# Altium PCB OpenMoteSTM.PcbDoc
Units mm, origin at the board's own origin, x right, y up, seen from the top; angles counter-clockwise.
Board outline 24.38 x 33.53 mm, 4 copper layers (TopLayer, MidLayer1, MidLayer30, BottomLayer); 53 components, 80 nets, 281 pads, 122 vias.
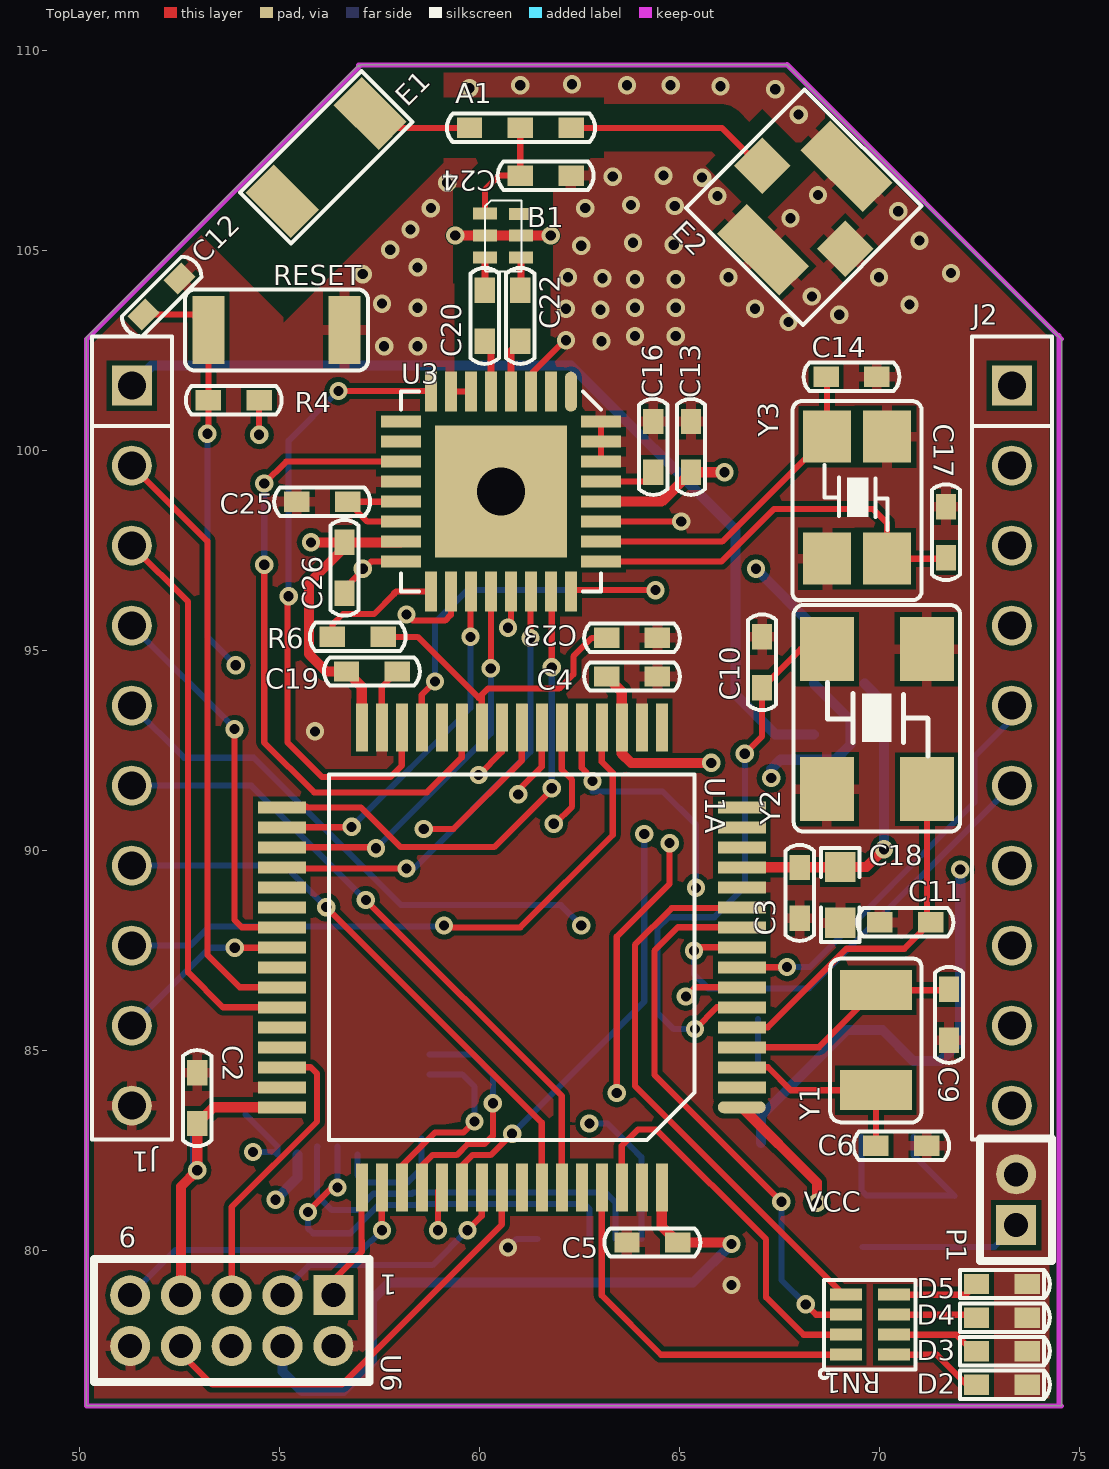
[diagram p0: TopLayer view]
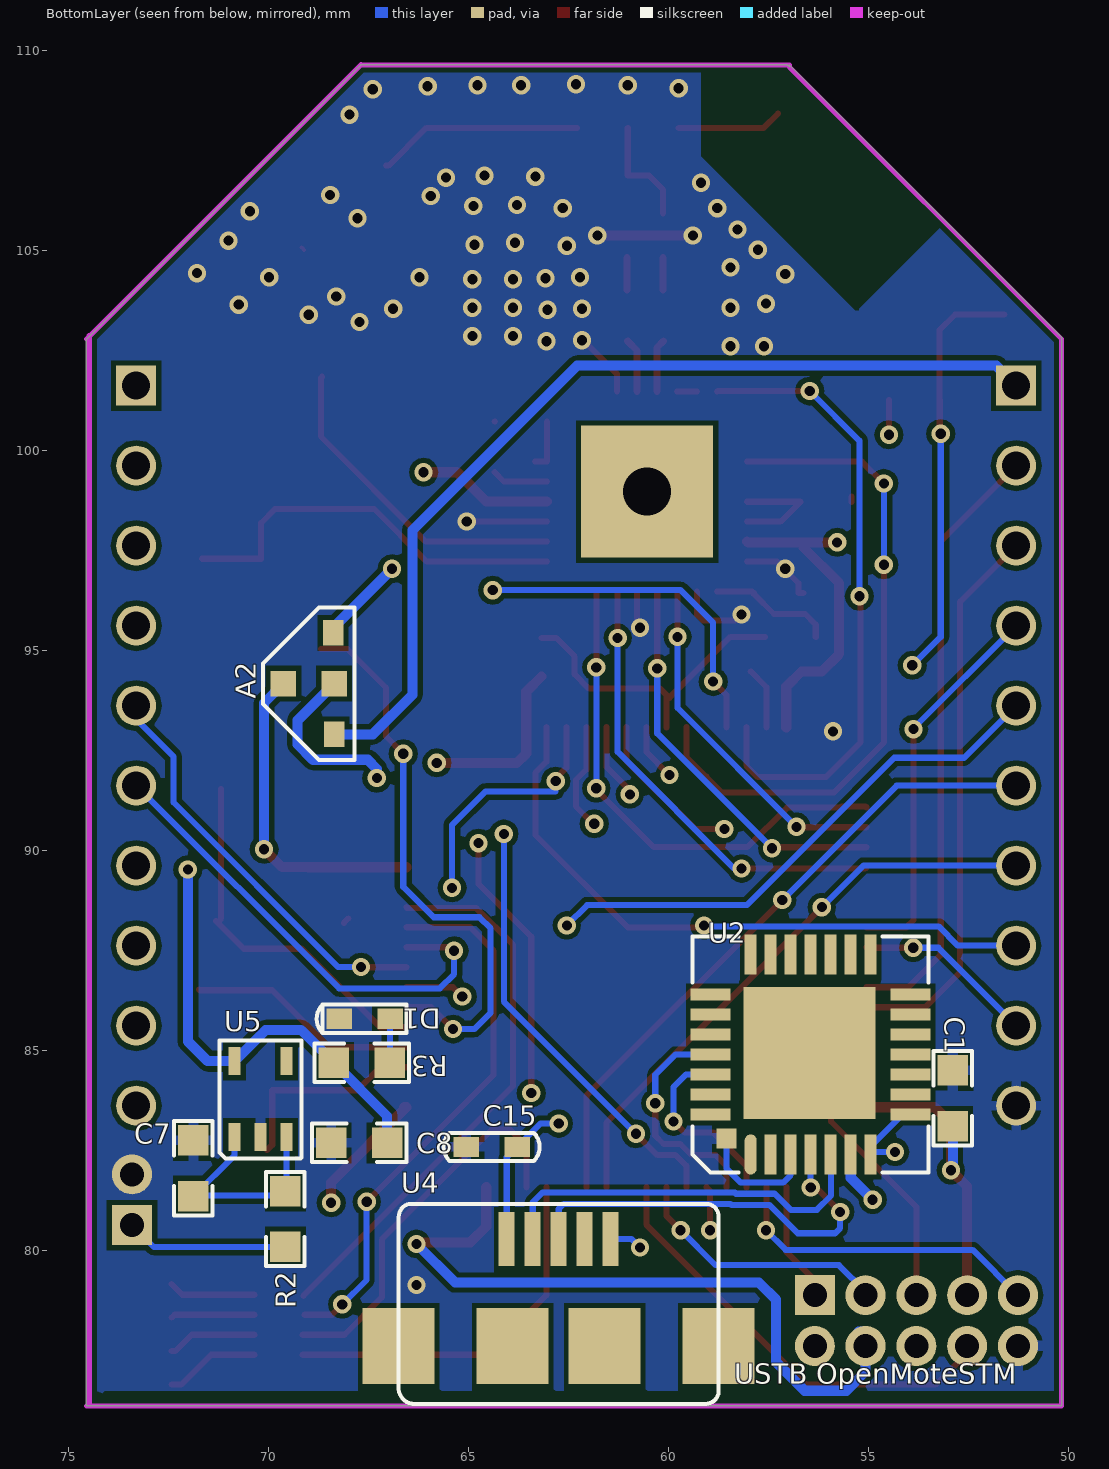
[diagram p1: BottomLayer view, seen from below]
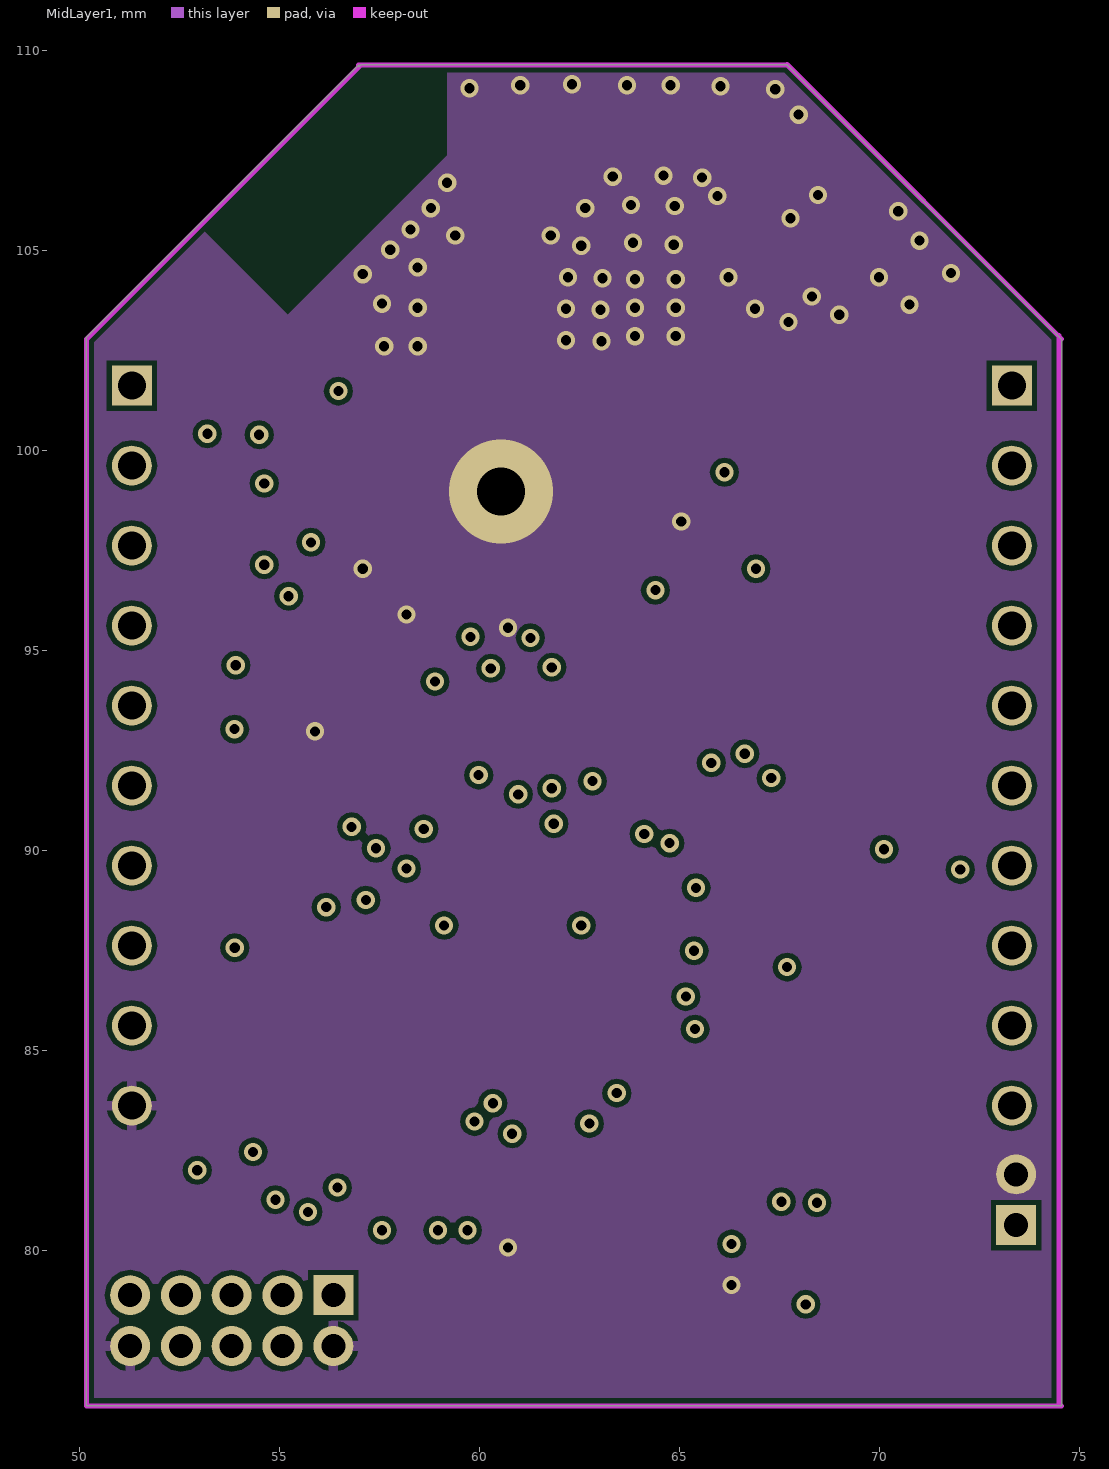
[diagram p2: MidLayer1]
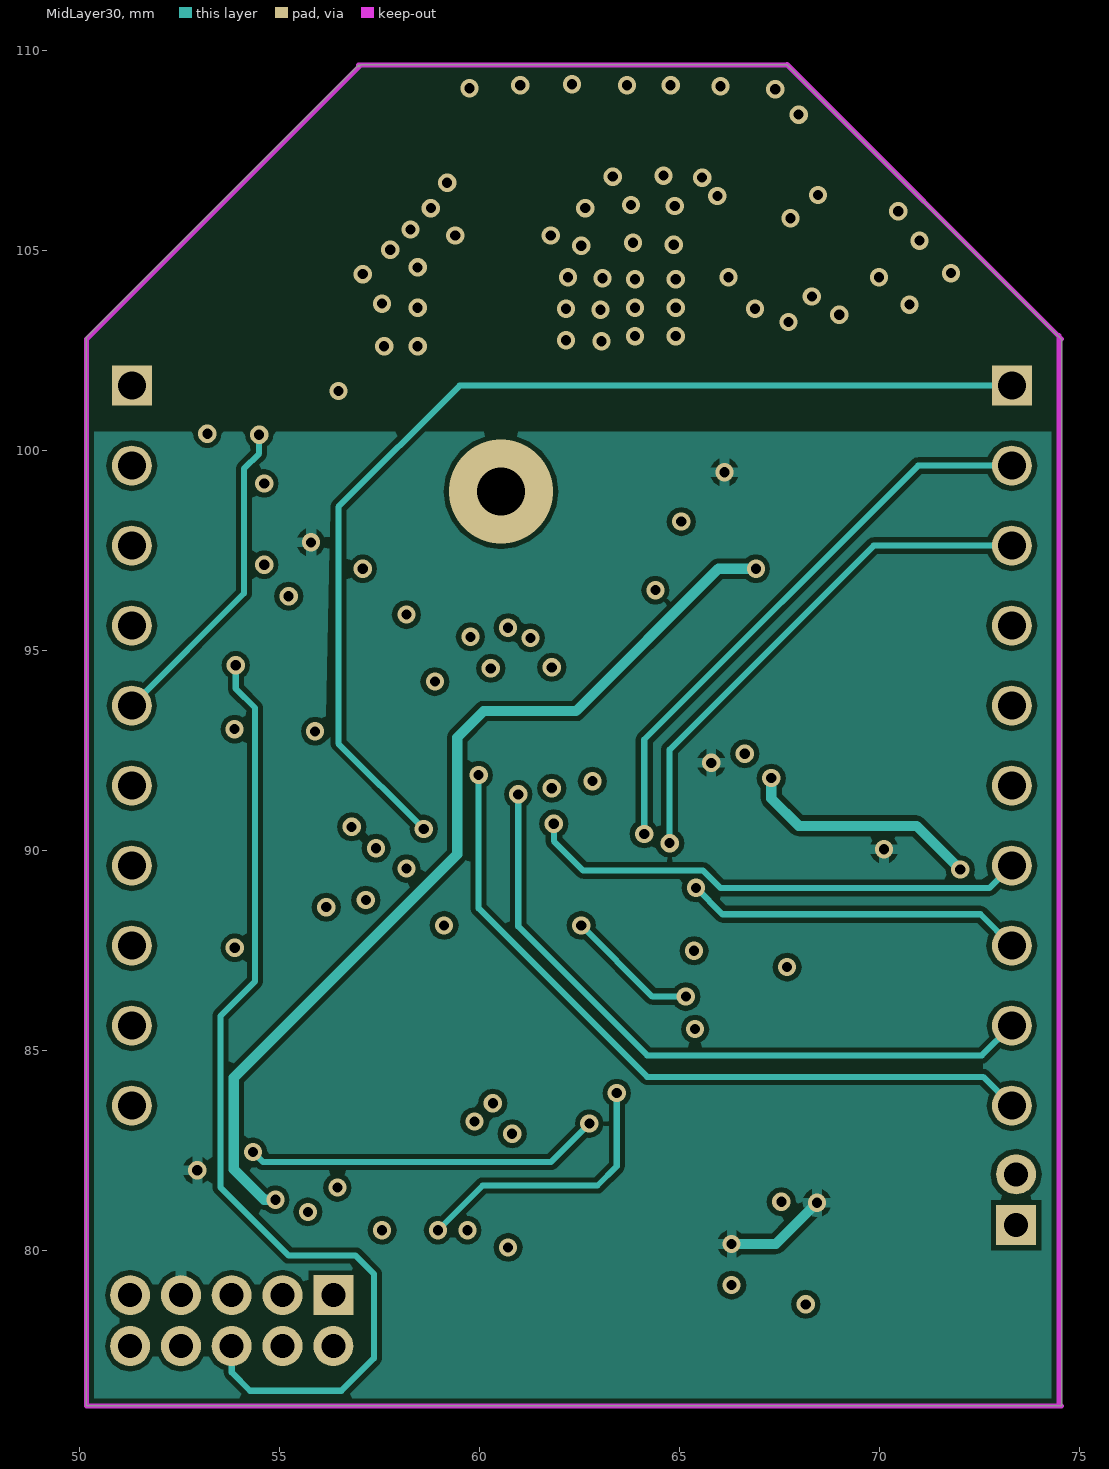
[diagram p3: MidLayer30]

## Layer stack, top to bottom
TopLayer: signal copper 0.0356
Dielectric: core 0.32, FR-4, Dk 4.8
MidLayer1: signal copper 0.0356
Dielectric: dielectric 0.32, FR-4, Dk 4.8
MidLayer30: signal copper 0.0356
Dielectric: dielectric 0.32, FR-4, Dk 4.8
BottomLayer: signal copper 0.0356

## Board outline
56.972,109.601 57.023,109.652 67.676,109.652 67.687,109.652 74.545,102.794 74.545,76.124 50.165,76.124 50.165,102.794 50.165,102.845 56.972,109.652

## Design rules (kind name [scope] priority, off if disabled: settings)
Clearance Clearance_Pad [HasPad('B1-1') OR HasPad('B1-6') OR HasPad('B1-3') OR HasPad('B1-4') OR HasPad('E2-1') OR HasPad('E1-1') OR HasPad('U3-5') OR HasPad('U3-4') vs HasPad('B1-5') OR HasPad('B1-2') OR HasPad('U3-3')OR HasPad('U3-6')OR HasPad('E2-2')OR HasPad('E2-3')OR HasPad('E2-4') OR HasPad('U3-33')] p1: gap=0.127
Clearance "Clearance RF" [InComponent('B1')OR InComponent('C24')OR InComponent('E1') vs InNet('GND')] p2 off: gap=0.508 // Clearance RF
Clearance "Clearance Blaun" [InNet('GND') AND ( Not (HasPad('B1-2') Or  HasPad('B1-5'))) vs InNet('UFL_ANT')OR InNet('CHIP_ANT')OR InNet('NetB1_3')OR InNet('NetB1_4') OR InNet('NetA1_2')OR InNet('NetA1_6')OR InNet('RFP')OR InNet('RFN')OR InNet('NetA1_2') OR InNet('NetB1_6')] p3: gap=0.508
Clearance Clearance_1 [All] p4: gap=0.127
FabricationTestPointUsage TestPointUsage [All] p1: valid=0 allowmultiple=FALSE
FabricationTestpoint Testpoint [All] p1: side=3 testpointundercomponent=TRUE minsize=1.016 maxsize=2.54 preferedsize=1.524 minholesize=0.508 maxholesize=1.016 preferedholesize=0.813 testpointgrid=0.025 allowsidetop=TRUE allowsidebottom=TRUE usegrid=TRUE gridtolerance=0
PasteMaskExpansion PasteMaskExpansion_1 [All] p1: expansion=0
PasteMaskExpansion [All] p2: expansion=0
PlaneClearance PlaneClearance_1 [All] p1 off: clearance=0.508
PlaneClearance [All] p2 off: clearance=0.254
PlaneConnect [All] p1 off: planeconnectstyle=Relief reliefexpansion=0.508 reliefentries=4 reliefconductorwidth=0.254 reliefairgap=0.254
PolygonConnect PolygonConnect_2 [HasFootprint('0402') OR HasFootprint('0603') OR   InComponent('RESET')OR InComponent('J1')OR InComponent('U6')OR InComponent('J4')OR InComponent('U2')OR InComponent('U4')OR InComponent('U5')OR InComponent('BT1')OR InComponent('Y2')OR InComponent('Y1')OR InComponent('Y3')OR HasFootprint('0402') OR HasFootprint('0603')OR InComponent('U3')OR InComponent('U1A')OR InComponent('E2')] p1: connectstyle=Relief reliefconductorwidth=0.254 reliefentries=4 polygonreliefangle="90 Angle"
PolygonConnect PolygonConnect_1 [InNet('+3V')] p2 off: connectstyle=Relief reliefconductorwidth=0.254 reliefentries=4 polygonreliefangle="90 Angle"
PolygonConnect [All vs InNet('GND')] p3: connectstyle=Direct reliefconductorwidth=0.254 reliefentries=4 polygonreliefangle="90 Angle"
RoomDefinition OpenMoteSTM_TOP [InComponentClass('OpenMoteSTM_TOP')] p1: confinementstyle=ConfineIn formatcopy=TRUE lockcomponents=FALSE outline 50.165,76.124 74.447,76.124 74.447,109.632 74.378,109.703 50.165,109.703
RoutingVias [All] p1: holewidth=0.203 width=0.508 viastyle="Through Hole" minholewidth=0.203 minwidth=0.508 maxholewidth=0.203 maxwidth=0.508
ShortCircuit ShortCircuit_1 [All] p1: allowed=FALSE
SilkscreenOverComponentPads [All] p1: minsilkscreentomaskgap=0.254
SolderMaskExpansion SolderMaskExpansion_1 [All] p1: expansion=0.102
SolderMaskExpansion [All] p2: expansion=0.051
UnRoutedNet UnRoutedNet_1 [All] p1 off:
UnRoutedNet [All] p2:
Width [All] p1: maxlimit=0.338 minlimit=2539.975 preferedwidth=0.254 toplayer_minwidth=0 midlayer1_minwidth=0 midlayer30_minwidth=0 bottomlayer_minwidth=0 minimp=50.000000 maximp=50.000000 favimp=50.000000
20 further rules are at their usual default settings.

## Components (designator, comment, footprint, x,y, rotation, side; value= is the part's Value field where it differs from the comment)
A1 "ANT_SWITCH" AN_SW 61.011,108.077 r0 top
A2 "POWER-SELECT" POWer-select 68.351,94.183 r90 bottom
B1 "HHM1711D1" HHM1711D1 60.579,105.385 r270 top
C1 "Cap Pol1" 0603 52.883,83.82 r90 bottom
C2 "Cap" 0402 52.934,83.82 r270 top
C3 "Cap" 0402 67.996,88.951 r90 top
C4 "Cap" 0402 63.805,94.361 r180 top
C5 "Cap" 0402 64.313,80.213 r0 top
C6 "Cap" 0402 70.536,82.626 r180 top
C7 "Cap Pol1" 0603 71.869,82.067 r90 bottom
C8 "Cap Pol1" 0603 67.729,82.702 r0 bottom
C9 "Cap" 0402 71.73,85.903 r90 top
C10 "Cap" 0402 67.056,94.717 r270 top
C11 "Cap" 0402 70.637,88.214 r0 top
C12 "Cap" 0402 52.045,103.861 r45 top
C13 "Cap Pol1" 0402 65.278,100.101 r270 top
C14 "Cap" 0402 69.291,101.854 r0 top
C15 "Cap Pol1" 0402 64.414,82.601 r0 bottom
C16 "Cap Pol1" 0402 64.338,100.101 r270 top
C17 "Cap" 0402 71.653,97.968 r90 top
C18 "Cap Pol1" 0603 69.012,88.9 r270 top
C19 "Cap" 0402 57.302,94.488 r180 top
C20 "Cap" 0402 60.122,103.378 r270 top
C22 "Cap" 0402 61.011,103.378 r270 top
C23 "Cap" 0402 63.805,95.326 r180 top
C24 "Cap" 0402 61.646,106.883 r180 top
C25 "Cap Pol1" 0402 56.058,98.73 r180 top
C26 "Cap Pol1" 0402 56.617,97.079 r270 top
D1 "GREEN" LED_0402 67.589,85.801 r180 bottom
D2 "YELLOW" LED_0402 73.05,76.657 r180 top
D3 "ORANGE" LED_0402 73.05,77.495 r180 top
D4 "GREEN" LED_0402 73.05,78.334 r180 top
D5 "RED" LED_0402 73.05,79.172 r180 top
E1 "ANT_1" "ANTENNA _AN3216" 56.159,107.34 r225 top
E2 "ANT_2" "ANTENNA _CONNECTOR_73412-0110" 68.097,106.096 r225 top
J1 "SIP-10" SIP-10 51.3,92.634 r270 top
J2 "SIP-10" SIP-10 73.3,92.634 r270 top
P1 "MHDR1X2" MHDR1X2 73.406,80.645 r90 top
R2 "Res2" 0603 69.571,80.797 r90 bottom
R3 "Res2" 0603 67.666,84.709 r180 bottom
R4 "Res2" 0402 53.848,101.27 r0 top
R6 "Res2" 0402 56.947,95.352 r0 top
RESET "SW-PB" RESET_BUTTON 54.915,103.022 r0 top
RN1 "Res Packet" 8P4R-0402 69.748,78.156 r90 top
U1A "STM32F103RET6" STM32 66.548,83.591 r180 top
U2 "CP2102" CP2102 56.439,84.912 r90 bottom
U3 "AT86RF231" AT86 60.528,98.984 r270 top
U4 "USB_Connector" USB_CONNECTOR_MICRO_B 62.738,80.975 r180 bottom
U5 "LP5951MG_3P3V" LP5951MG_3.3V 70.193,83.795 r180 bottom
U6 "MCU JTAG" MHDR2X5 56.337,78.892 r180 top
Y1 "XTAL" "LSE OSC" 69.901,85.268 r270 top
Y2 "CRYSTAL-4 PINS" "HSE OSC" 69.926,93.294 r90 top
Y3 "CRYSTAL-4 PINS" RF_CRYSTAL 69.432,98.831 r270 top

## Footprints (in the part's own frame and the unit in brackets; to place one, negate y for a bottom-side part, rotate by r counter-clockwise, add the part's x,y. Pads: shape width x height; smd on the part's side, far side on the other; paste and mask are expansions set on the pad)
8P4R-0402 [mm]
  rect 0.3x0.8 smd: 1(-0.75,0.6) 2(-0.25,0.6) 3(0.25,0.6) 4(0.75,0.6) 5(0.75,-0.6) 6(0.25,-0.6) 7(-0.25,-0.6) 8(-0.75,-0.6)
  silkscreen extent -1.33,-1.14 1.12,1.25
0402 [mil]
  rect 25x20 smd: 1(-25,0) 2(25,0)
  silkscreen extent -47,-14 47,14
0603 [mil]
  rect 30x30 smd: 1(-27.5,0) 2(27.5,0)
  silkscreen extent -46,-19 46,19
AN_SW [mil]
  rect 25x20 smd: 1(-50,0) 2(0,0) 3(50,0)
  silkscreen extent -72,-14 74,14
"ANTENNA _AN3216" [mm]
  rect 1x1.6 smd: 1(-1.55,0) 2(1.55,0)
  silkscreen extent -2.15,-0.9 2.15,0.9
"ANTENNA _CONNECTOR_73412-0110" [mm]
  rect 1x1 smd: 1(0,-1.466) 3(0,1.466)
  rect 1.05x2.2 smd: 2(1.475,0.034) 4(-1.475,0.034)
  TopLayer lines w0.1: 0.043,1.466 0,1.466 -0.043,1.466
  silkscreen extent -2.1,-2.07 2.1,2.07
AT86 [mm]
  oval 1x0.3 smd: 1(-2.5,1.75)
  rect 1x0.3 smd: 2(-2.5,1.25) 3(-2.5,0.75) 4(-2.5,0.25) 5(-2.5,-0.25) 6(-2.5,-0.75) 7(-2.5,-1.25) 8(-2.5,-1.75) 17(2.5,-1.75) 18(2.5,-1.25) 19(2.5,-0.75) 20(2.5,-0.25) 21(2.5,0.25) 22(2.5,0.75) 23(2.5,1.25) 24(2.5,1.75)
  rect 0.3x1 smd: 9(-1.75,-2.5) 10(-1.25,-2.5) 11(-0.75,-2.5) 12(-0.25,-2.5) 13(0.25,-2.5) 14(0.75,-2.5) 15(1.25,-2.5) 16(1.75,-2.5) 25(1.75,2.5) 26(1.25,2.5) 27(0.75,2.5) 28(0.25,2.5) 29(-0.25,2.5) 30(-0.75,2.5) 31(-1.25,2.5) 32(-1.75,2.5)
  rect 3.3x3.3 smd: 33(0,0)
  rect 3.3x3.3 smd far side: 34(0,0)
  silkscreen extent -2.5,-2.5 2.5,2.5
CP2102 [mm]
  oval 1x0.3 smd: 1(-2.5,1.5)
  rect 1x0.3 smd: 2(-2.5,1) 3(-2.5,0.5) 4(-2.5,0) 5(-2.5,-0.5) 6(-2.5,-1) 7(-2.5,-1.5) 15(2.5,-1.5) 16(2.5,-1) 17(2.5,-0.5) 18(2.5,0) 19(2.5,0.5) 20(2.5,1) 21(2.5,1.5)
  rect 0.3x1 smd: 8(-1.5,-2.5) 9(-1,-2.5) 10(-0.5,-2.5) 11(0,-2.5) 12(0.5,-2.5) 13(1,-2.5) 14(1.5,-2.5) 22(1.5,2.5) 23(1,2.5) 24(0.5,2.5) 25(0,2.5) 26(-0.5,2.5) 27(-1,2.5) 28(-1.5,2.5)
  rect 0.5x0.5 smd: 29(-2.1,2.1)
  rect 3.3x3.3 smd: 30(0.04,0.027)
  silkscreen extent -2.95,-2.95 2.95,2.95
HHM1711D1 [mm]
  rect 0.3x0.6 smd: 1(-0.55,-0.45) 2(0,-0.45) 3(0.55,-0.45) 4(0.55,0.45) 5(0,0.45) 6(-0.541,0.45)
  TopLayer region: -0.541,-0.012 -0.541,-0.012 -0.541,-0.012 -0.541,-0.012
  silkscreen extent -0.88,-0.45 0.9,0.46
"HSE OSC" [mm]
  rect 1.6x1.35 smd: 1(-1.75,-1.25) 2(1.75,-1.25) 3(1.75,1.25) 4(-1.75,1.25)
  silkscreen extent -2.81,-2.08 2.85,2.08
LED_0402 [mil]
  rect 25x20 smd: 1(25,0) 2(-25,0)
  silkscreen extent -47,-14 41,14
LP5951MG_3.3V [mm] "SC70"
  rect 0.3x0.7 smd: 1(-0.65,-0.95) 2(0,-0.95) 3(0.65,-0.95) 4(0.65,0.95) 5(-0.65,0.95)
  silkscreen extent -1.03,-1.48 1.03,1.46
"LSE OSC" [mm]
  rect 1x1.8 smd: 1(-1.25,0) 2(1.25,0)
  silkscreen extent -2.04,-1.14 2.06,1.14
MHDR1X2 [mm] "Connector; Header; 2 Position"
  rect 1x1 hole 0.6: 1(0,0)
  round 1 hole 0.6: 2(1.27,0)
  silkscreen extent -0.9,-0.9 2.17,0.9
MHDR2X5 [mm] "Connector; Header; 5x2 Position"
  rect 1x1 hole 0.6: 1(0,0)
  round 1 hole 0.6: 2(0,1.27) 3(1.27,0) 4(1.27,1.27) 5(2.54,0) 6(2.54,1.27) 7(3.81,0) 8(3.81,1.27) 9(5.08,0) 10(5.08,1.27)
  silkscreen extent -0.9,-0.9 5.98,2.17
POWer-select [mil]
  rect 25x20 smd: 1(-50,0) 3(50,1)
  rect 25x25 smd: 2(0,0) 4(0,50)
  silkscreen extent -75,-20 75,70
RESET_BUTTON [mm]
  rect 0.8x1.7 smd: 1(-1.7,0) 2(1.7,0)
  silkscreen extent -2.29,-1.02 2.29,1.02
RF_CRYSTAL [mm]
  rect 1.3x1.2 smd: 1(-1.526,-0.75) 2(1.526,-0.75) 3(1.526,0.75) 4(-1.526,0.75)
  silkscreen extent -2.42,-1.61 2.57,1.61
SIP-10 [mm]
  rect 1x1 hole 0.7: 1(-9,0)
  round 1 hole 0.7: 2(-7,0) 3(-5,0) 4(-3,0) 5(-1,0) 6(1,0) 7(3,0) 8(5,0) 9(7,0) 10(9,0)
  silkscreen extent -10.22,-1 9.84,1
STM32 [mm]
  oval 1.2x0.3 smd: 1(0,0)
  rect 1.2x0.3 smd: 2(0,-0.5) 3(0,-1) 4(0,-1.5) 5(0,-2) 6(0,-2.5) 7(0,-3) 8(0,-3.5) 9(0,-4) 10(0,-4.5) 11(0,-5) 12(0,-5.5) 13(0,-6) 14(0,-6.5) 15(0,-7) 16(0,-7.5) 33(11.5,-7.5) 34(11.5,-7) 35(11.5,-6.5) 36(11.5,-6) 37(11.5,-5.5) 38(11.5,-5) 39(11.5,-4.5) 40(11.5,-4) 41(11.5,-3.5) 42(11.5,-3) 43(11.5,-2.5) 44(11.5,-2) 45(11.5,-1.5) 46(11.5,-1) 47(11.5,-0.5) 48(11.5,0)
  rect 0.3x1.2 smd: 17(2,-9.5) 18(2.5,-9.5) 19(3,-9.5) 20(3.5,-9.5) 21(4,-9.5) 22(4.5,-9.5) 23(5,-9.5) 24(5.5,-9.5) 25(6,-9.5) 26(6.5,-9.5) 27(7,-9.5) 28(7.5,-9.5) 29(8,-9.5) 30(8.5,-9.5) 31(9,-9.5) 32(9.5,-9.5) 49(9.5,2) 50(9,2) 51(8.5,2) 52(8,2) 53(7.5,2) 54(7,2) 55(6.5,2) 56(6,2) 57(5.5,2) 58(5,2) 59(4.5,2) 60(4,2) 61(3.5,2) 62(3,2) 63(2.5,2) 64(2,2)
  silkscreen extent 1.18,-8.31 10.31,0.82
USB_CONNECTOR_MICRO_B [mm]
  rect 0.4x1.35 smd: 1(-1.3,-0.675) 2(-0.65,-0.675) 3(0,-0.675) 4(0.65,-0.675) 5(1.3,-0.675)
  rect 1.8x1.9 smd: ""(-4,-3.35) ""(-1.15,-3.35) ""(1.15,-3.35) ""(4,-3.35)
  silkscreen extent -4,-4.8 4,0.2

## Part data
A1: library part AN_SWITCH, "AN_SW"
B1: "blaun"
C1 C7 C8 C13 C15 C16 C18 C25 C26: "Polarized Capacitor (Radial)"
C2 C3 C4 C5 C6 C9 C10 C11 C12 C14 C17 C19 C20 C22 C24: "Capacitor"
C23: library part CAP, "Capacitor"
D1 D2 D3 D4 D5: library part Diode, "Default Diode"
P1: "Header, 2-Pin"
R2 R3 R4 R6: "Resistor"
RESET: "Switch"
U2: "uart to USB"
U4: "Micro-B"
U5: library part LP5951MG_3V, "voltage regular"
U6: "JTAG 10PIN"
Y1: "Crystal Oscillator"

## Via types
v1: diameter 0.457, hole 0.254, TopLayer to BottomLayer, 121 vias
v2: diameter 2.6, hole 1.2, TopLayer to BottomLayer, 1 vias

## Nets (pads, with @x,y where several pads share a name; then routed paths per layer and width w, separated by ;. In a path a pad name is that pad's centre, name@x,y a point inside that pad or via, vN(x,y) a via of type N, cw(c..) or ccw(c..) an arc to the next point about the centre after c; other vN are vias at no path point)
3P3VOUT: A2.3 U2.6 | length 27.3
  MidLayer30 w0.254: v1(54.889,81.28) 54.61,81.28 53.848,82.042 53.848,84.328 59.436,89.916 59.436,92.838 60.095,93.497 62.408,93.497 65.964,97.053 v1(66.904,97.053)
  BottomLayer w0.254: v1(54.889,81.28) 55.439,81.829 U2.6 ; v1(66.904,97.053) 68.377,95.58 A2.3
BAT: P1.1 R2.1 | length 4.1
  BottomLayer w0.152: R2.1 72.86,80.099 P1.1
CHIP_ANT: A1.1 E1.1 | length 2.6
  TopLayer w0.152: E1.1 E1.1@57.615,108.077
  TopLayer w0.155: E1.1@57.615,108.077 A1.1
GND: B1.2 B1.5 C1.2 C2.1 C3.1 C4.1 C5.1 C6.1 C7.2 C8.2 C9.1 C10.1 C11.1 C12.2 C13.1 C14.2 C15.2 C16.1 C17.2 C18.2 C19.1 C23.1 C24.1 C25.2 C26.2 D1.2 D2.2 D3.2 D4.2 D5.2 E2.2 E2.3 E2.4 J1.10 P1.2 RESET.2 U1A.12 U1A.18 U1A.31 U1A.47 U1A.63 U2.3 U2.29 U3.3 U3.6 U3.7 U3.12 U3.16 U3.18 U3.21 U3.27 U3.30 U3.31 U3.32 U3.33 U4.5 U5.2 U6.2 U6.10 Y2.2 Y2.4 Y3.2 Y3.4 | length 18.3
  TopLayer w0.152: C2.1@52.883,84.506 C2.1 ; C25.2 C25.2@55.423,98.857 ; C26.2 56.744,96.444 56.744,96.698 57.28,97.234 U3.16 U3.16@58.032,97.238 ; U1A.31 57.548,94.099 C19.1 ; v1(58.166,95.91) 58.318,95.758 59.131,95.758 59.278,95.905 U3.18 ; U3.7 U3.6 ; v1(60.706,95.58) 60.778,95.652 U3.21 ; U3.3 61.278,101.921 62.125,102.768 v1(62.154,102.768) ; U3.27 v1(65.036,98.234) ; U3.32 U3.31 U3.30 U3.30@63.336,99.734 ; C16.1@64.336,100.734 C16.1 ; C3.1 C3.1@68.11,88.201
  TopLayer w0.254: v1(59.385,105.385) B1.2 B1.5 v1(61.773,105.385)
  BottomLayer w0.152: U2.3 56.939,81.898 57.127,81.709 58.189,81.709 58.539,82.059 U2.29 ; v1(60.706,80.086) 60.92,80.3 U4.5
  other v1: 66.294,79.146 55.88,92.989 57.074,97.053 57.607,102.616 58.445,102.616 63.043,102.743 63.881,102.87 64.897,102.87 67.716,103.226 68.986,103.403 63.017,103.53 62.154,103.556 66.878,103.556 58.445,103.581 63.881,103.581 64.897,103.581 70.739,103.657 57.556,103.683 68.301,103.861 63.881,104.292 64.897,104.292 63.068,104.318 62.205,104.343 66.218,104.343 69.977,104.343 57.074,104.419 71.78,104.445 58.445,104.589 57.76,105.029 62.535,105.131 64.846,105.156 63.83,105.207 70.993,105.258 58.268,105.537 67.767,105.816 70.46,105.994 58.776,106.07 62.636,106.07 64.872,106.121 63.779,106.147 65.938,106.375 68.453,106.401 59.182,106.705 65.557,106.832 63.322,106.858 64.592,106.883 67.97,108.407 67.386,109.042 59.741,109.068 66.015,109.118 61.011,109.144 63.678,109.144 64.77,109.144 62.306,109.169
  other v2: 60.528,98.984
JNRST: U1A.56 U6.8 | length 11.1
  TopLayer w0.152: U6.8 52.527,77.445 53.315,76.657 56.548,76.657 60.548,80.658 U1A.56
JTCK: U1A.49 U6.1 | length 2.7
  TopLayer w0.152: U6.1@56.312,79.248 57.048,79.984 57.048,80.257 57.04,80.265 57.04,81.583 U1A.49
JTDI: U1A.50 U6.9 | length 8.3
  TopLayer w0.152: U1A.50 57.548,80.526 v1(57.556,80.518)
  BottomLayer w0.152: U6.9@51.232,79.248 U6.9@51.435,79.248 ; U6.9 52.392,80.027 57.066,80.027 v1(57.556,80.518)
JTDO: U1A.55 U6.3 | length 6.6
  TopLayer w0.152: v1(59.69,80.518) 60.048,80.876 U1A.55
  BottomLayer w0.152: U6.3 55.067,78.982 55.732,79.646 58.818,79.646 v1(59.69,80.518)
JTMS: U1A.46 U6.5 | length 7.4
  TopLayer w0.152: U6.5 53.797,81.102 55.931,83.236 55.931,84.43 55.769,84.591 U1A.46 U1A.46@55.057,84.582
LED1: D2.1 RN1.8 | length 2.4
  TopLayer w0.152: RN1.8 71.425,77.406 72.174,76.657 D2.1
LED2: D3.1 RN1.7 | length 2.2
  TopLayer w0.152: RN1.7 71.912,77.906 72.323,77.495 D3.1
LED3: D4.1 RN1.6 | length 2.1
  TopLayer w0.152: RN1.6 72.343,78.406 D4.1
LED4: D5.1 RN1.5 | length 2.2
  TopLayer w0.152: RN1.5 72.149,78.906 D5.1
LED_POW: D1.1 R3.2 | length 1.1
  BottomLayer w0.152: R3.2@66.954,84.722 D1.1
NetA1_2: A1.2 B1.1 C24.2 | length 2.8
  TopLayer w0.155: B1.1 60.129,106.535 60.477,106.883 C24.2 A1.2
NetB1_3: B1.3 C20.1 | length 0.8
  TopLayer w0.18: C20.1@60.129,104.02 B1.3
NetB1_4: B1.4 C22.1 | length 0.8
  TopLayer w0.18: C22.1@61.029,104.031 B1.4
NETB1_6: B1.6
NetC12_1: C12.1 R4.1 RESET.1 U6.6 | length 35.8
  TopLayer w0.152: C12.1 52.826,103.412 RESET.1@53.213,103.024 ; v1@53.213,100.457 R4.1 ; R4.1@53.215,101.272 RESET.1
  MidLayer30 w0.152: U6.6 53.797,76.962 54.254,76.505 56.54,76.505 57.353,77.318 57.353,79.426 56.896,79.883 55.22,79.883 53.518,81.585 53.518,85.877 54.381,86.741 54.381,93.574 53.899,94.056 v1(53.899,94.64)
  BottomLayer w0.152: v1(53.188,100.432) 53.188,95.352 v1(53.899,94.64) ; U6.6@53.772,77.978 U6.6@53.975,77.978
NetC14_1: C14.1 U3.26 Y3.1 | length 8.2
  TopLayer w0.152: U3.26 66.058,97.734 Y3.1 68.682,101.829 C14.1
NetC16_2: C16.2 U3.29 | length 1.4
  TopLayer w0.152: U3.29 64.106,99.234 C16.2
NetC17_1: C17.1 U3.25 Y3.3 | length 10.2
  TopLayer w0.152: U3.25 66.037,97.234 67.356,98.552 69.825,98.552 70.182,98.195 Y3.3 71.651,97.305 C17.1@71.653,97.307
NetC25_1: C25.1 U3.13 U3.14 | length 2.9
  TopLayer w0.152: U3.14 57.189,98.234 C25.1 58.024,98.73 U3.13
NetR6_1: R6.1 U3.17 | length 3.1
  TopLayer w0.152: R6.1 56.312,95.656 56.578,95.923 57.356,95.923 57.861,96.428 57.861,96.444 57.901,96.484 U3.17
OSC32_IN: C6.2 U1A.3 Y1.2 | length 5.1
  TopLayer w0.152: U1A.3 67.204,84.591 67.778,84.018 Y1.2 69.901,82.652 C6.2@70.028,82.525
OSC32_OUT: C9.2 U1A.4 Y1.1 | length 5.8
  TopLayer w0.152: U1A.4 68.474,85.091 Y1.1 71.71,86.518 C9.2
OSC_IN: C11.2 U1A.5 Y2.1 | length 9.2
  TopLayer w0.152: U1A.5 67.202,85.591 69.164,87.554 70.612,87.554 C11.2 ; Y2.1 71.176,88.31 C11.2 ; C11.2@71.303,88.245 C11.2
OSC_OUT: C10.2 U1A.6 Y2.3 | length 14.4
  TopLayer w0.152: v1(65.38,85.547) 65.924,86.091 U1A.6 ; v1(66.624,92.431) 67.056,92.862 C10.2 68.019,95.044 Y2.3
  BottomLayer w0.152: v1(65.38,85.547) 64.846,85.547 64.44,85.954 64.44,88.062 64.719,88.341 65.862,88.341 66.624,89.103 v1(66.624,92.431)
PA0_WKUP: U1A.14
PA1: U1A.15
PA2: U1A.16
PA3: U1A.17
PA4: J1.8 U1A.20 | length 16.1
  TopLayer w0.152: v1(59.106,88.138) 59.055,88.087 61.011,88.087 63.322,90.399 63.322,91.955 63.048,92.229 U1A.20
  BottomLayer w0.152: J1.8 52.761,87.634 53.243,88.115 59.083,88.115 v1(59.106,88.138)
PA5: J2.8 U1A.21 | length 14.7
  TopLayer w0.152: U1A.21 62.548,92.074 62.814,91.808 v1(62.814,91.745)
  MidLayer30 w0.152: v1(65.405,89.078) 66.065,88.417 72.517,88.417 J2.8
  BottomLayer w0.152: v1(62.814,91.745) 62.814,91.491 64.567,91.491 65.405,90.653 v1(65.405,89.078)
PA6: J2.7 U1A.22 | length 15.3
  TopLayer w0.152: v1(61.849,90.678) 61.874,90.678 62.306,91.11 62.306,91.777 62.048,92.036 U1A.22
  MidLayer30 w0.152: v1(61.849,90.678) 61.849,90.246 62.586,89.51 65.584,89.51 66.016,89.078 72.744,89.078 J2.7
PA7: J2.9 U1A.23 | length 19.2
  TopLayer w0.152: v1(60.96,91.415) 60.96,91.516 61.548,92.104 U1A.23
  MidLayer30 w0.152: v1(60.96,91.415) 60.96,88.113 64.186,84.887 72.553,84.887 J2.9
PA8: U1A.41
PA9: J1.2 U1A.42 | length 15.2
  TopLayer w0.152: J1.2 53.188,97.746 53.188,87.401 53.998,86.591 U1A.42
PA10: J1.3 U1A.43 | length 14
  TopLayer w0.152: J1.3 52.705,96.229 52.705,86.964 53.578,86.091 U1A.43
PA11: U1A.44
PA12: U1A.45
PB5: U1A.57
PB6: J1.7 U1A.58 | length 14.5
  TopLayer w0.152: v1(56.159,88.595) 61.548,83.207 U1A.58
  BottomLayer w0.152: J1.7 55.121,89.634 v1(56.159,88.595)
PB7: J1.6 U1A.59 | length 16.2
  TopLayer w0.152: v1(57.15,88.773) 62.048,83.875 U1A.59
  BottomLayer w0.152: J1.6 54.289,91.634 v1(57.15,88.773)
PB8: RN1.1 U1A.61 | length 9.4
  TopLayer w0.152: U1A.61 63.048,78.887 64.529,77.406 RN1.1
PB9: RN1.2 U1A.62 | length 9.8
  TopLayer w0.152: U1A.62 63.548,82.629 63.952,83.033 64.414,83.033 67.158,80.289 67.158,78.842 68.093,77.906 RN1.2
PC0: J2.5 U1A.8 | length 10.3
  TopLayer w0.152: U1A.8 67.686,87.091 v1(67.681,87.097)
  BottomLayer w0.152: v1(67.681,87.097) 68.25,87.097 72.365,91.211 72.365,92.354 73.3,93.29 J2.5
PC1: J2.6 U1A.9 | length 12
  TopLayer w0.152: v1(65.354,87.503) 65.443,87.591 U1A.9
  BottomLayer w0.152: v1(65.354,87.503) 65.354,86.919 65.71,86.563 68.229,86.563 J2.6
PC2: RN1.3 U1A.10 | length 13.9
  TopLayer w0.152: U1A.10 64.952,88.091 64.364,87.503 64.364,84.404 v1(67.539,81.229) ; v1(68.148,78.664) 68.406,78.406 RN1.3@69.096,78.406
  BottomLayer w0.152: v1(67.539,81.229) 67.539,79.273 v1(68.148,78.664)
PC3: RN1.4 U1A.11 | length 14
  TopLayer w0.152: U1A.11 66.526,88.57 64.795,88.57 63.877,87.652 63.877,84.125 RN1.4@69.122,78.88
PC4: J2.1 U1A.24 | length 31
  TopLayer w0.152: v1(58.598,90.551) 59.342,90.551 61.048,92.257 U1A.24
  MidLayer30 w0.152: v1(58.598,90.551) 56.464,92.685 56.464,98.603 59.495,101.634 J2.1
PC5: J2.10 U1A.25 | length 20.1
  TopLayer w0.152: v1(59.969,91.897) 60.548,92.476 U1A.25
  MidLayer30 w0.152: v1(59.969,91.897) 59.969,88.564 64.18,84.353 72.581,84.353 J2.10
PC6: U1A.37
PC7: U1A.38
PC8: J1.4 U1A.39 | length 9.7
  TopLayer w0.152: v1(53.868,93.045) 53.868,88.27 54.047,88.091 U1A.39
  BottomLayer w0.152: J1.4 53.868,93.066 v1(53.868,93.045)
PC9: J1.9 U1A.40 | length 4.6
  TopLayer w0.152: v1(53.873,87.579) 55.036,87.579 U1A.40
  BottomLayer w0.152: J1.9 53.245,87.579 v1(53.873,87.579)
PC12: J2.3 U1A.53 | length 27.9
  TopLayer w0.152: v1(58.953,80.518) 58.953,81.497 U1A.53 ; v1(63.424,83.947) 63.424,87.859 64.745,89.179 v1(64.745,90.195)
  MidLayer30 w0.152: v1(58.953,80.518) 60.071,81.636 62.941,81.636 63.424,82.118 v1(63.424,83.947) ; v1(64.745,90.195) 64.745,92.532 69.846,97.634 J2.3
PD2: J2.2 U1A.54 | length 25.4
  TopLayer w0.152: U1A.54 59.548,82.129 59.814,82.395 60.271,82.395 v1(60.808,82.931)
  MidLayer30 w0.152: v1(64.11,90.424) 64.11,92.786 70.957,99.634 J2.2
  BottomLayer w0.152: v1(60.808,82.931) 64.11,86.233 v1(64.11,90.424)
RESET: J1.5 R4.2 U1A.7 | length 27.3
  TopLayer w0.152: v1(54.483,100.406) R4.2 ; v1(65.151,86.36) 65.382,86.591 U1A.7
  MidLayer30 w0.152: J1.5 54.102,96.436 54.102,99.554 54.483,99.935 v1(54.483,100.406) ; v1(62.535,88.138) 64.313,86.36 v1(65.151,86.36)
  BottomLayer w0.152: J1.5 52.605,92.329 54.349,92.329 58.032,88.646 62.027,88.646 v1(62.535,88.138)
RF_/RST: U1A.30 U3.8 | length 15.9
  TopLayer w0.152: v1(55.22,96.368) 55.194,96.342 55.194,92.71 56.058,91.846 57.76,91.846 58.048,92.135 U1A.30 ; v1(56.464,101.498) 58.764,101.498 U3.8
  BottomLayer w0.152: v1(55.22,96.368) 55.22,100.254 v1(56.464,101.498)
RF_/SEL: U1A.33 U3.23 | length 12.7
  TopLayer w0.152: U1A.33 55.066,91.11 55.671,91.11 55.697,91.084 57.03,91.084 58.021,90.094 60.358,90.094 61.798,91.534 v1(61.798,91.567) ; v1(61.798,94.59) U3.23@61.798,96.464
  BottomLayer w0.152: v1(61.798,91.567) v1(61.798,94.59)
RF_CLKM: C23.2 R6.2 U1A.26 | length 7.9
  TopLayer w0.152: R6.2 58.445,95.352 59.972,93.825 60.048,93.901 ; U1A.26 60.048,93.901 ; C23.2 62.803,95.326 62.339,94.862 62.339,94.412 61.983,94.056 60.203,94.056 60.048,93.901
RF_IRQ: U1A.29 U3.24 | length 10.7
  TopLayer w0.152: U1A.29 58.548,93.903 58.877,94.232 v1(58.877,94.234) ; U3.24@62.314,96.52 v1(64.389,96.52)
  BottomLayer w0.152: v1(58.877,94.234) 58.877,95.707 59.69,96.52 v1(64.389,96.52)
RF_MISO: U1A.35 U3.20 | length 10
  TopLayer w0.152: U1A.35 57.381,90.091 v1(57.404,90.068) ; v1(60.274,94.564) 60.274,96.48 U3.20
  BottomLayer w0.152: v1(57.404,90.068) 60.274,92.939 v1(60.274,94.564)
RF_MOSI: U1A.36 U3.22 | length 11.4
  TopLayer w0.152: U1A.36 55.079,89.56 v1(58.166,89.56) ; v1(61.265,95.326) U3.22@61.265,96.445
  BottomLayer w0.152: v1(58.166,89.56) 58.351,89.56 61.265,92.474 v1(61.265,95.326)
RF_SCLK: U1A.34 U3.19 | length 8.9
  TopLayer w0.152: U1A.34 56.805,90.591 v1(56.794,90.602) ; v1(59.766,95.352) U3.19@59.766,96.472
  BottomLayer w0.152: v1(56.794,90.602) 59.766,93.574 v1(59.766,95.352)
RF_SLP_TR: U1A.27 U3.11 | length 16.7
  TopLayer w0.152: v1(54.61,97.155) 54.61,92.71 55.855,91.465 58.674,91.465 59.548,92.339 U1A.27 ; v1(54.61,99.187) 55.157,99.734 U3.11 ; 59.045,91.856 59.055,91.846
  BottomLayer w0.152: v1(54.61,97.155) v1(54.61,99.187)
RFN: C20.2 U3.5 | length 1.3
  TopLayer w0.18: C20.2 60.278,102.587 U3.5
RFP: C22.2 U3.4 | length 1.4
  TopLayer w0.18: U3.4 60.778,102.51 C22.2
RTC: U1A.2
UART_RX4: U1A.52 U2.25 | length 5.9
  TopLayer w0.152: U1A.52 58.548,82.129 58.814,82.395 59.419,82.395 59.698,82.674 60.119,82.674 60.325,82.88 v1(60.325,83.693)
  BottomLayer w0.152: U2.25@58.739,84.912 U2.25 59.817,84.912 60.325,84.404 v1(60.325,83.693)
UART_TX4: U1A.51 U2.26 | length 4.9
  TopLayer w0.152: U1A.51 58.048,82.129 58.876,82.956 59.588,82.956 v1(59.868,83.236)
  BottomLayer w0.152: U2.26@58.739,84.412 U2.26 59.555,84.412 59.868,84.099 v1(59.868,83.236)
UFL_ANT: A1.3 E2.1 | length 5.2
  TopLayer w0.152: E2.1@66.992,107.132 E2.1
  TopLayer w0.155: A1.3 66.047,108.077 E2.1@66.992,107.132
USB_5V: C15.1 U2.7 U2.8 U4.1 | length 14.6
  MidLayer30 w0.152: v1(54.331,82.474) 54.585,82.22 61.773,82.22 v1(62.738,83.185)
  BottomLayer w0.152: U2.8@54.139,83.412 54.939,82.612 U2.7 54.877,82.474 v1(54.331,82.474) ; v1(62.738,83.185) 63.195,83.185 C15.1 64.038,82.342 U4.1
USB_D+: U2.4 U4.3 | length 10.5
  TopLayer w0.152: v1(55.702,80.975) v1@56.439,81.712
  BottomLayer w0.152: v1(55.702,80.975) 55.702,80.569 55.829,80.442 56.762,80.442 57.47,81.15 58.42,81.15 58.448,81.178 62.611,81.178 62.738,81.051 U4.3 ; v1@56.439,81.712 U2.4 U2.4@56.439,82.612
  other v1: 56.439,81.585
USB_D-: U2.5 U4.2 | length 10
  BottomLayer w0.152: U2.5@55.939,82.612 55.931,82.604 55.931,81.382 56.286,81.026 56.936,81.026 57.339,81.43 58.304,81.43 58.333,81.458 63.144,81.458 63.388,81.214 U4.2
VCC3.3V: A2.4 C1.1 C2.2 C3.2 C4.2 C5.2 C13.2 C18.1 C19.2 C26.1 U1A.1 U1A.13 U1A.19 U1A.32 U1A.48 U1A.64 U3.15 U3.28 U6.4 U6.7 | length 55.1
  TopLayer w0.254: U6.7 52.527,81.61 v1(52.934,82.017) C2.2 53.34,83.591 U1A.48 ; v1(55.778,97.714) C26.1 ; U1A.32 57.048,94.107 C19.2 56.159,94.488 55.728,94.92 55.728,96.698 56.617,97.587 C26.1 ; U3.15 58.008,97.714 C26.1 ; U3.28 64.545,98.734 C13.2 v1(66.116,99.466) ; C4.2 63.548,93.983 U1A.19 63.548,92.433 63.779,92.202 v1(65.786,92.202) ; U1A.64 64.548,80.613 C5.2 v1@66.256,80.213 ; U1A.13 C18.1@69.005,89.591 ; U1A.1@66.598,83.591 U1A.1 68.428,81.712 v1(68.428,81.204) ; C18.1 69.659,89.599 v1(70.104,90.043)
  MidLayer30 w0.254: v1(66.294,80.175) 67.399,80.175 v1(68.428,81.204)
  BottomLayer w0.254: v1@52.883,82.067 C1.1 ; U6.4@55.042,77.978 U6.4@55.245,77.978 ; U6.4 55.067,76.987 55.55,76.505 56.591,76.505 57.302,77.216 57.302,78.778 57.734,79.21 65.329,79.21 v1(66.294,80.175) ; A2.4 70.104,93.701 v1(70.104,90.043)
VCC_EXT: A2.1 J1.1 | length 23.5
  BottomLayer w0.254: J1.1 51.799,102.133 62.281,102.133 66.396,98.019 66.396,93.904 67.386,92.913 A2.1
VCC_OUT: A2.2 C8.1 R3.1 U5.5 | length 21.7
  MidLayer30 w0.254: v1(67.285,91.821) 67.285,91.313 67.97,90.627 70.917,90.627 v1(72.009,89.535)
  BottomLayer w0.254: C8.1 67.031,83.376 R3.1 69.177,85.522 70.066,85.522 U5.5 71.511,84.745 72.009,85.242 v1(72.009,89.535) ; v1(67.285,91.821) 67.285,92.05 67.513,92.278 68.885,92.278 69.266,92.659 69.266,93.269 A2.2
VIN_5V: C7.1 R2.2 U5.1 U5.3 | length 5.6
  BottomLayer w0.152: U5.3 69.543,81.511 69.672,81.382 C7.1@71.857,81.382 ; U5.1 70.843,82.395 C7.1@71.857,81.382 ; C7.1 C7.1@71.857,81.382
pads on no net: E1.2 J2.4 U1A.28 U1A.60 U2.1 U2.2 U2.9 U2.10 U2.11 U2.12 U2.13 U2.14 U2.15 U2.16 U2.17 U2.18 U2.19 U2.20 U2.21 U2.22 U2.23 U2.24 U2.27 U2.28 U2.30 U3.1 U3.2 U3.9 U3.10 U3.34 U4. U4.4 U5.4

## Polygon pours and split planes (outlines as drawn)
GND on TopLayer "TopLayer_GND" (solid, pour order 9): 52.742,105.681 55.079,103.345 55.079,103.167 55.079,103.192 59.092,107.205 59.092,107.231 59.092,109.593 59.041,109.644 59.092,109.695 67.419,109.695 74.231,102.883 74.231,76.217 49.897,76.217 49.897,102.786 49.847,102.837 52.666,105.656 52.691,105.656
GND on MidLayer1 "MidLayer1_GND" (solid, pour order 11): 52.883,105.842 52.883,105.715 55.194,103.403 59.182,107.391 59.182,107.417 59.182,109.804 59.157,109.83 59.182,109.855 67.524,109.855 67.556,109.855 74.323,103.088 74.393,103.018 74.393,76.327 50.013,76.327 50.013,102.997 50.063,102.997 52.807,105.74
GND on BottomLayer "BottomLayer_GND" (solid, pour order 17): 52.883,105.893 55.22,103.556 55.22,103.505 55.321,103.505 59.131,107.315 59.182,107.366 59.182,109.804 67.535,109.804 74.272,103.067 74.272,103.022 74.272,76.329 74.27,76.327 74.092,76.505 49.962,76.505 49.962,102.997 50.038,103.073 52.857,105.893 52.883,105.893
VCC3.3V on MidLayer30 "MidLayer30_VCC" (solid, pour order 6): 50.165,100.482 74.473,100.482 74.473,76.124 74.447,76.149 50.165,76.149 50.165,100.457

## Keep-outs
KeepOutLayer:
  lines w0.127: 56.972,109.601 50.165,102.794 50.165,76.124 74.545,76.124 ; 56.972,109.652 67.676,109.652 ; 67.676,109.662 74.545,102.794 ; 74.475,76.215 74.475,102.885

## Other copper
TopLayer:
  text ".GTL" at 137.668,24.765 h0.5
BottomLayer:
  text ".GBL" at 137.668,24.765 h0.5

## Silkscreen, mask and mechanical layers (free items; w line width, h text height)
TopOverlay:
  text "VCC" at 68.097,80.975 h0.5
  text ".GTO" at 137.668,24.765 h0.5
BottomOverlay:
  text "USTB OpenMoteSTM" at 58.344,76.683 h0.5
TopPaste:
  text ".GTP" at 137.668,24.765 h0.5
BottomPaste:
  text ".GBP" at 137.668,24.765 h0.5
TopSolder:
  text ".GTS" at 137.668,24.765 h0.5
BottomSolder:
  text ".GBS" at 137.668,24.765 h0.5
Mechanical1:
  drawing of 332 lines, arcs and shapes, not listed
  text "6.0" at 9.525,173.99 h0.5
  text "5.0" at 9.525,148.59 h0.5
  text "4.0" at 9.525,123.19 h0.5
  text "3.0" at 9.525,97.79 h0.5
  text "32.94 (mm)" at 44.983,85.586 h1.52 r90
  text "2.0" at 9.525,72.39 h0.5
  text "24.38 (mm)" at 55.601,72.162 h1.52
  text "PLACE" at 124.968,48.641 h0.5
  text "1.0" at 10.16,46.99 h0.5
  text "TITLE:" at 60.642,45.402 h0.5
  text "ENGINEER:" at 38.1,45.085 h0.5
  text "LOGO" at 124.968,45.085 h0.5
  text "Custom Made Board" at 76.835,41.275 h0.5
  text "HERE" at 124.968,41.021 h0.5
  text "PHONE:" at 38.1,40.322 h0.5
  text "ENGINEER:" at 38.1,35.433 h0.5
  text "PART NO.:" at 60.96,33.337 h0.5
  text "REV:" at 105.093,33.337 h0.5
  text "DATE:" at 116.84,33.337 h0.5
  text "01" at 109.537,31.432 h0.5
  text ".PRINT_DATE" at 122.555,31.432 h0.5
  text "PHONE:" at 38.1,30.797 h0.5
  text "FILE NAME:" at 38.1,26.289 h0.5
  text "LAYER:" at 84.836,26.289 h0.5
  text "GERBER:" at 131.064,26.289 h0.5
  text ".PCB_FILE_NAME_NO_PATH" at 48.26,24.765 h0.5
  text ".LAYER_NAME" at 90.932,24.765 h0.5
  text "0" at 12.383,21.59 h0.5
  text "Y" at 19.05,19.367 h0.5 r270
  text "X" at 23.177,13.97 h0.5
  text "0" at 26.67,8.89 h0.5 r270
  text "1.0" at 52.07,8.89 h0.5 r270
  text "2.0" at 77.47,8.89 h0.5 r270
  text "3.0" at 102.87,8.89 h0.5 r270
  text "4.0" at 128.27,8.89 h0.5 r270
  text "5.0" at 153.67,8.89 h0.5 r270
  text "6.0" at 179.07,8.89 h0.5 r270
  text "7.0" at 204.47,8.89 h0.5 r270

## Text inside footprints (layer, text, board x,y; h text height)
U6: TopOverlay "9" at 51.41,80.594 h0.5 r180; TopOverlay "1" at 57.937,79.4 h0.5 r180